# Altium PCB RASP.PcbDoc
Units mm, origin at the board's own origin, x right, y up, seen from the top; angles counter-clockwise.
Board outline 65 x 56 mm, 2 copper layers (Top Layer, Bottom Layer); 13 components, 15 nets, 101 pads, 0 vias.
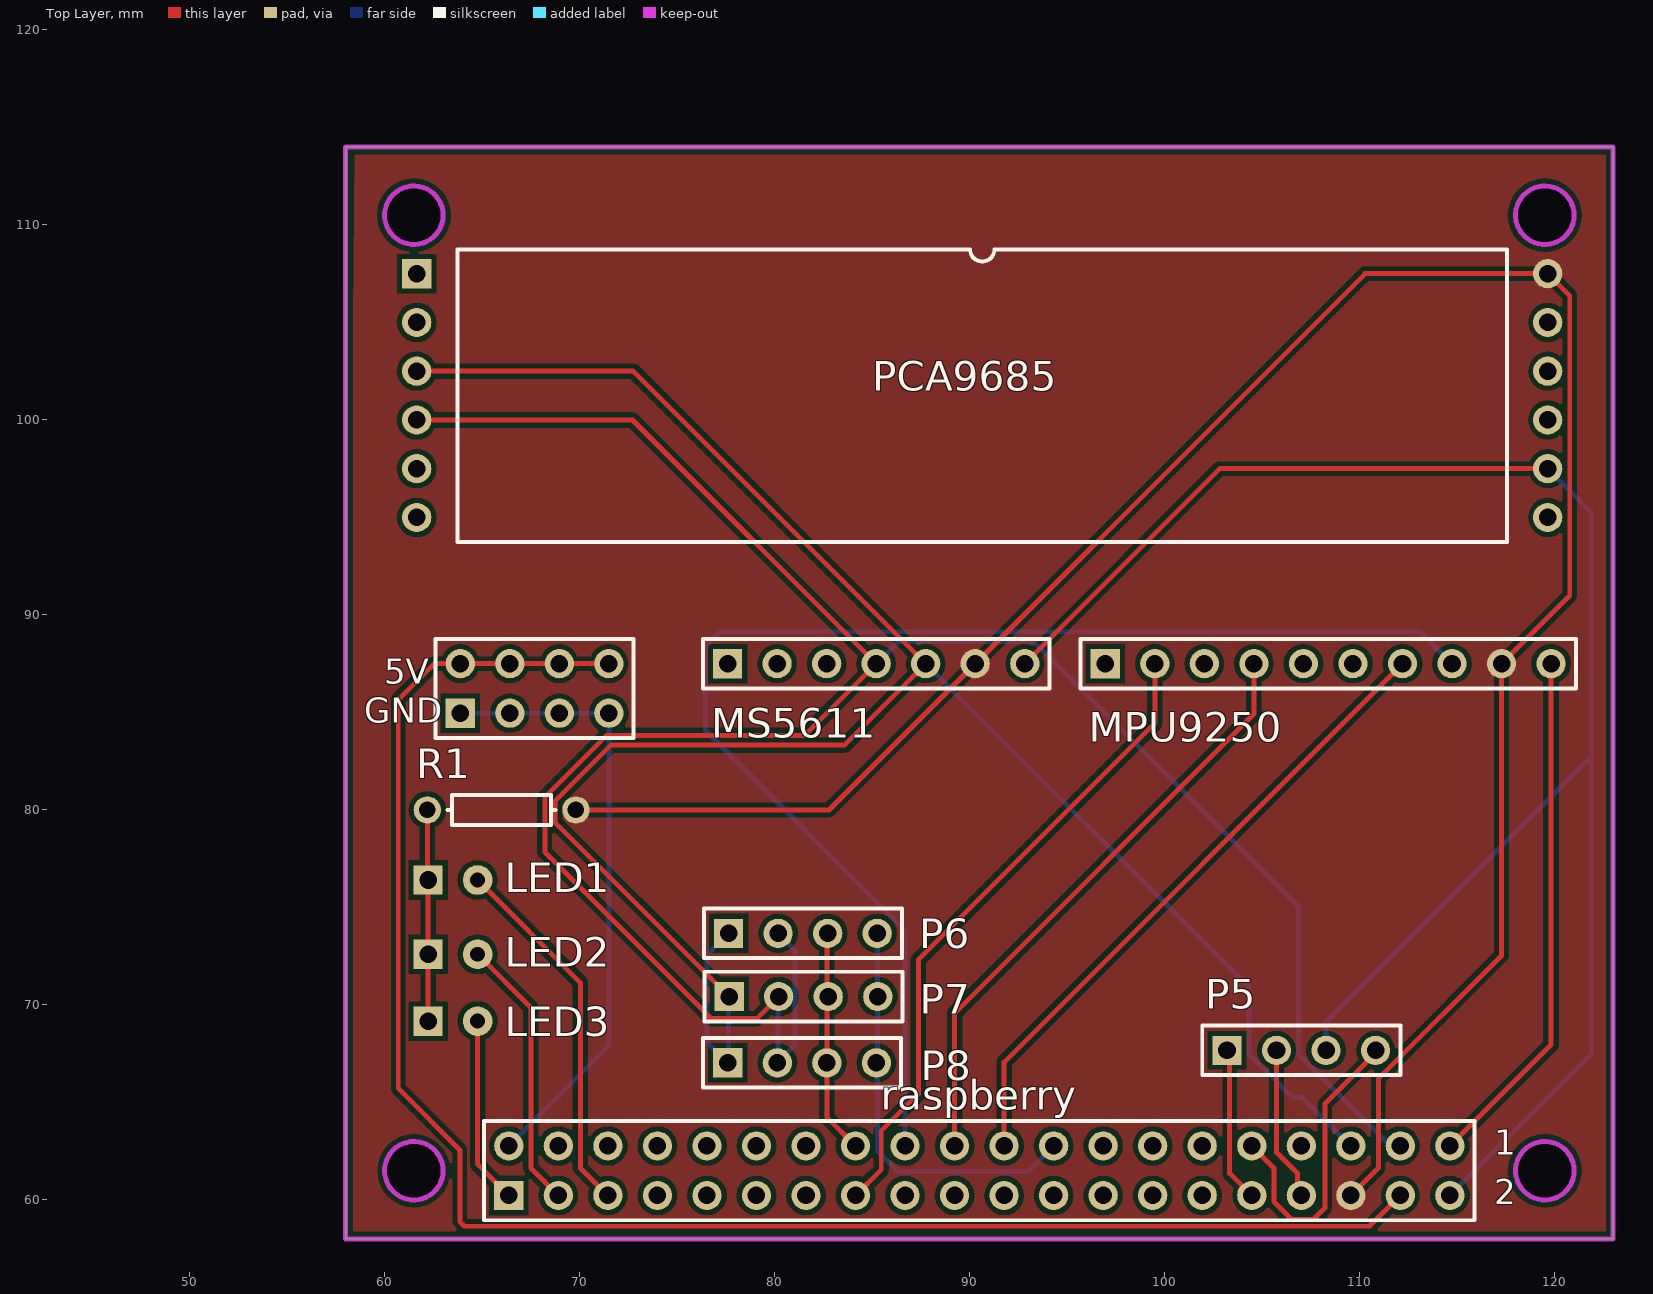
[diagram p0: Top Layer view]
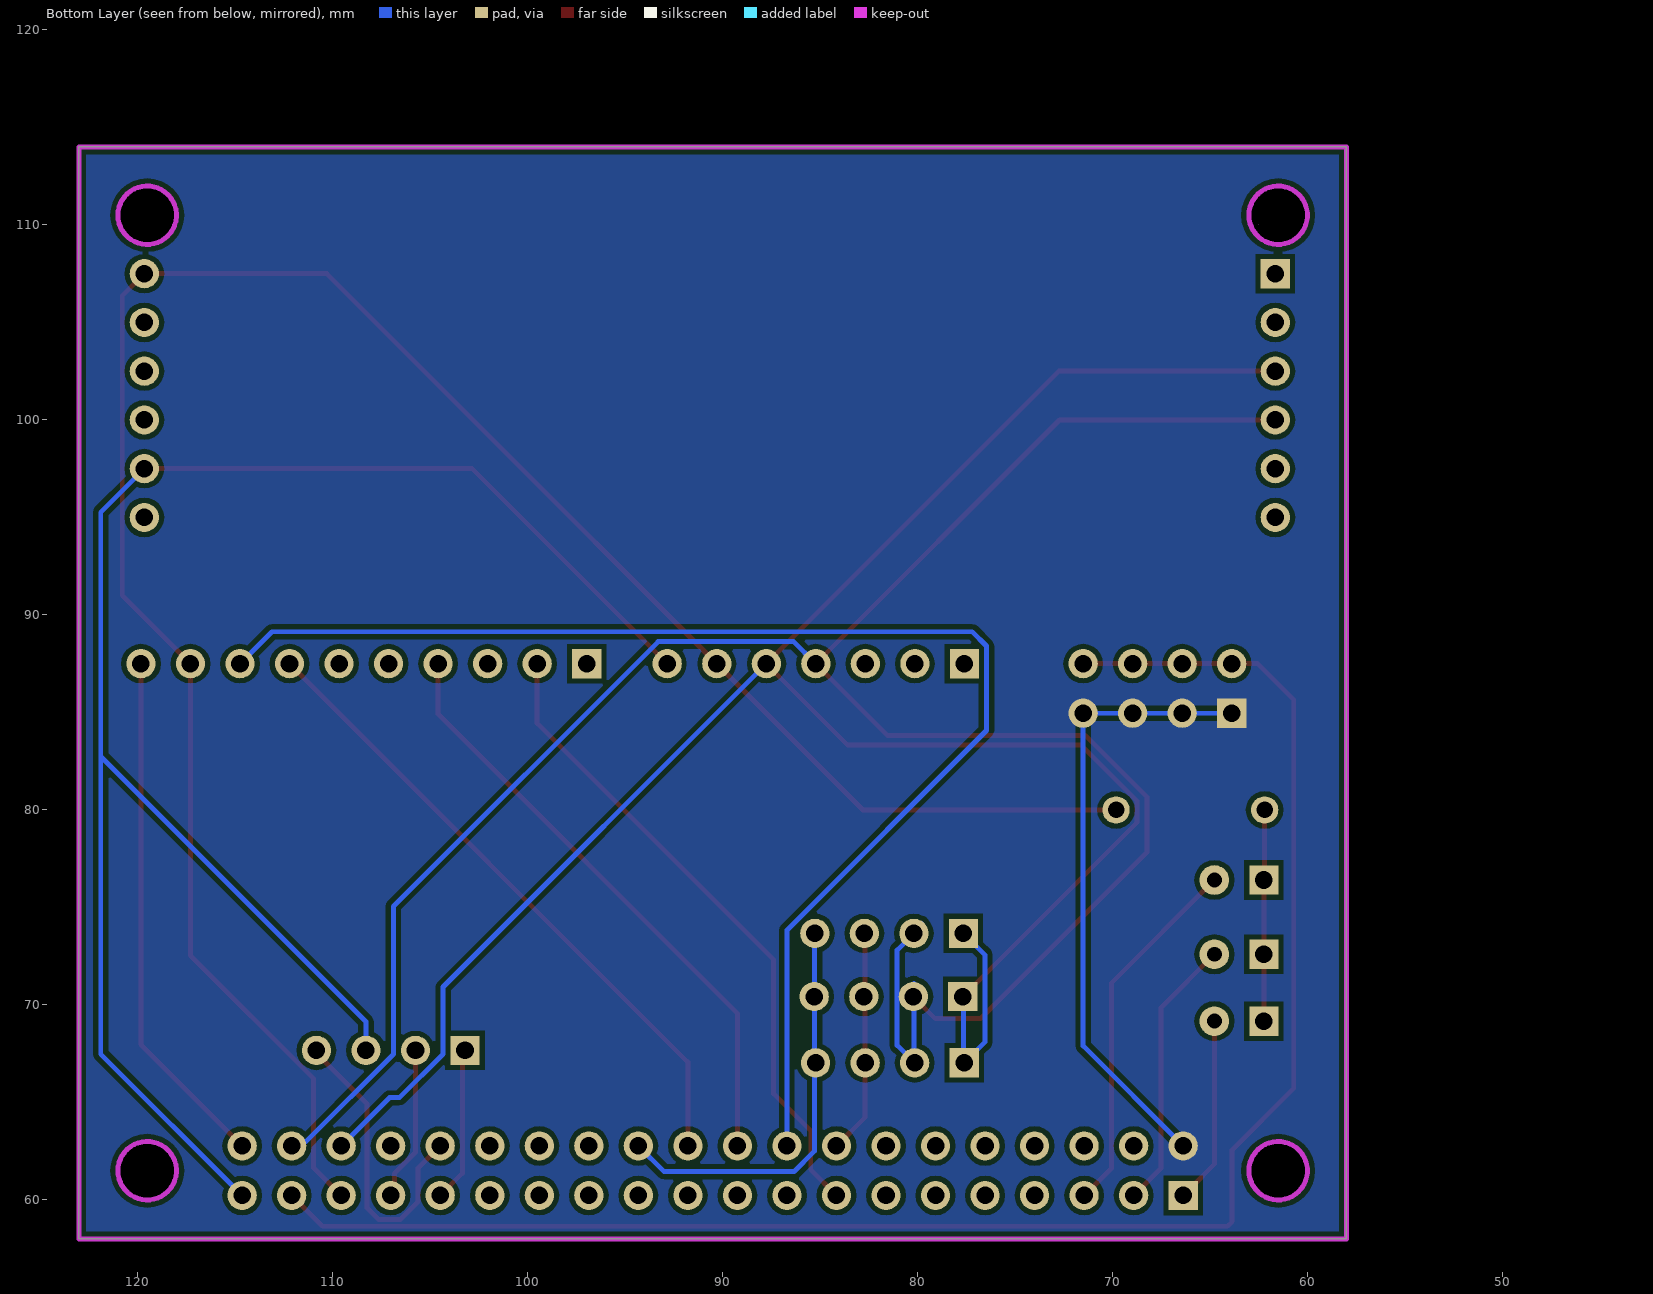
[diagram p1: Bottom Layer view, seen from below]

## Layer stack, top to bottom
Top Solder: solder mask 0.0102, Solder Resist, Dk 3.5
Top Layer: signal copper 0.0356
Dielectric 1: dielectric 0.32, FR-4, Dk 4.8
Bottom Layer: signal copper 0.0356
Bottom Solder: solder mask 0.0102, Solder Resist, Dk 3.5

## Board outline
58,58 58,114 123,114 123,58
cut-out: 61.5,60 cw(c61.5,61.5) 60,61.5 cw(c61.5,61.5) 61.5,63 cw(c61.5,61.5) 63,61.5 cw(c61.5,61.5)
cut-out: 118,61.5 ccw(c119.5,61.5) 119.5,60 ccw(c119.5,61.5) 121,61.5 ccw(c119.5,61.5) 119.5,63 ccw(c119.5,61.5)
cut-out: 118,110.5 ccw(c119.5,110.5) 119.5,109 ccw(c119.5,110.5) 121,110.5 ccw(c119.5,110.5) 119.5,112 ccw(c119.5,110.5)
cut-out: 61.5,109 cw(c61.5,110.5) 60,110.5 cw(c61.5,110.5) 61.5,112 cw(c61.5,110.5) 63,110.5 cw(c61.5,110.5)
cut-out: 62.5,110

## Design rules (kind name [scope] priority, off if disabled: settings)
Clearance [All] p1: gap=0.254 ignorepadtopadclearanceinfootprint=FALSE except(0: Arc-Hole Track-Hole SMDPad-Hole THPad-Hole Via-Hole Fill-Hole Poly-Hole Region-Hole Text-Hole)
PolygonConnect [All] p1: connectstyle=Direct reliefconductorwidth=0.254 reliefentries=4 polygonreliefangle="90 Angle" airgapwidth=0.254
RoutingVias [All] p1: holewidth=0.711 width=1.27 viastyle="Through Hole" minholewidth=0.711 minwidth=1.27 maxholewidth=0.711 maxwidth=1.27
SolderMaskExpansion [All] p1: expansion=0.102
Width [All] p1: maxlimit=0.254 minlimit=0.254 preferedwidth=0.254
30 further rules are at their usual default settings.

## Classes and differential pairs
component class PCA9685: PCA9685

## Components (designator, comment, footprint, x,y, rotation, side; value= is the part's Value field where it differs from the comment)
LED1 "LED0" "LED - duplicate" 62.23,76.407 r0 top
LED2 "LED0" "LED - duplicate" 62.23,72.597 r0 top
LED3 "LED0" "LED - duplicate" 62.23,69.168 r0 top
MPU9250 "MPU6250" HDR1X10 96.96,87.5 r0 top (schematic designator P2)
MS5611 "MS5611" HDR1X7 77.589,87.5 r0 top (schematic designator P1)
P5 "Comment" HDR1X4 103.2,67.67 r0 top
P6 "Comment" HDR1X4 77.64,73.67 r0 top
P7 "Comment" HDR1X4 77.67,70.43 r0 top
P8 "Comment" HDR1X4 77.6,67.03 r0 top
PCA9685 "PCA9685" "PCA9685 - duplicate1" 61.648,107.5 r0 top (schematic designator U1)
R1 "Res1" AXIAL-0.3 66,80 r180 top value=1K
raspberry "Header 20X2" HDR2X20 66.37,60.23 r0 top locked (schematic designator P3)
? "Comment" HDR2X4 63.88,84.96 r0 top

## Footprints (in the part's own frame and the unit in brackets; to place one, negate y for a bottom-side part, rotate by r counter-clockwise, add the part's x,y. Pads: shape width x height; smd on the part's side, far side on the other; paste and mask are expansions set on the pad)
AXIAL-0.3 [mm] "Axial Device, Thru-Hole; 2 Leads; 0.3 in Pin Spacing"
  round 1.4 hole 0.85: 1(-3.81,0) 2(3.81,0)
  silkscreen extent -2.77,-0.76 2.77,0.76
HDR1X4 [mm] "Connector; Header; 4 Position"
  rect 1.5x1.5 hole 0.9: 1(0,0)
  round 1.5 hole 0.9: 2(2.54,0) 3(5.08,0) 4(7.62,0)
  silkscreen extent -1.27,-1.27 8.89,1.27
HDR1X7 [mm] "Connector; Header; 7 Position"
  rect 1.5x1.5 hole 0.9: 1(0,0)
  round 1.5 hole 0.9: 2(2.54,0) 3(5.08,0) 4(7.62,0) 5(10.16,0) 6(12.7,0) 7(15.24,0)
  silkscreen extent -1.27,-1.27 16.51,1.27
HDR1X10 [mm] "Connector; Header; 10 Position"
  rect 1.5x1.5 hole 0.9: 1(0,0)
  round 1.5 hole 0.9: 2(2.54,0) 3(5.08,0) 4(7.62,0) 5(10.16,0) 6(12.7,0) 7(15.24,0) 8(17.78,0) 9(20.32,0) 10(22.86,0)
  silkscreen extent -1.27,-1.27 24.13,1.27
HDR2X4 [mm] "Connector; Header; 4x2 Position"
  rect 1.5x1.5 hole 0.9: 1(0,0)
  round 1.5 hole 0.9: 2(0,2.54) 3(2.54,0) 4(2.54,2.54) 5(5.08,0) 6(5.08,2.54) 7(7.62,0) 8(7.62,2.54)
  silkscreen extent -1.27,-1.27 8.89,3.81
HDR2X20 [mm] "Connector; Header; 20x2 Position"
  round 1.5 hole 0.9: 1(48.26,2.54) 2(48.26,0) 3(45.72,2.54) 4(45.72,0) 5(43.18,2.54) 6(43.18,0) 7(40.64,2.54) 8(40.64,0) 9(38.1,2.54) 10(38.1,0) 11(35.56,2.54) 12(35.56,0) 13(33.02,2.54) 14(33.02,0) 15(30.48,2.54) 16(30.48,0) 17(27.94,2.54) 18(27.94,0) 19(25.4,2.54) 20(25.4,0) 21(22.86,2.54) 22(22.86,0) 23(20.32,2.54) 24(20.32,0) 25(17.78,2.54) 26(17.78,0) 27(15.24,2.54) 28(15.24,0) 29(12.7,2.54) 30(12.7,0) 31(10.16,2.54) 32(10.16,0) 33(7.62,2.54) 34(7.62,0) 35(5.08,2.54) 36(5.08,0) 37(2.54,2.54) 38(2.54,0) 39(0,2.54)
  rect 1.5x1.5 hole 0.9: 40(0,0)
  silkscreen extent -1.27,-1.27 49.53,3.81
"LED - duplicate" [mm] "LED; 2 Leads"
  rect 1.5x1.5 hole 0.9: 1(0,0)
  round 1.524 hole 0.762: 2(2.54,0)
"PCA9685 - duplicate1" [mm]
  rect 1.5x1.5 hole 0.9: 1(0,0)
  round 1.5 hole 0.9: 2(0,-2.5) 3(0,-5) 4(0,-7.5) 5(0,-10) 6(0,-12.5) 7(58,-12.5) 8(58,-10) 9(58,-7.5) 10(58,-5) 11(58,-2.5) 12(58,0)
  silkscreen extent 2.08,-13.75 55.92,1.25

## Part data
LED1 LED2 LED3: "Typical INFRARED GaAs LED", LatestRevisionDate=08-Jul-2005, LatestRevisionNote="Mech Layer 1 removed.", PackageDescription="LED; 2 Leads", PackageReference=LED-0, Published=8-Jun-2000, Publisher="Altium Limited"
MPU9250: library part "Header 10", "Header, 10-Pin", LatestRevisionDate=17-Jul-2002, LatestRevisionNote="Re-released for DXP Platform.", Publisher="Altium Limited"
MS5611: library part "Header 7", "Header, 7-Pin", LatestRevisionDate=17-Jul-2002, LatestRevisionNote="Re-released for DXP Platform.", Publisher="Altium Limited"
R1: "Resistor", LatestRevisionDate=17-Jul-2002, LatestRevisionNote="Re-released for DXP Platform.", PackageDescription="Axial Device, Thru-Hole; 2 Leads; 0.3 in Pin Spacing", PackageReference=AXIAL-0.3, Published=8-Jun-2000, Publisher="Altium Limited"
raspberry: "Header, 20-Pin, Dual row", LatestRevisionDate=17-Jul-2002, LatestRevisionNote="Re-released for DXP Platform.", Publisher="Altium Limited"

## Nets (pads, with @x,y where several pads share a name; then routed paths per layer and width w, separated by ;. In a path a pad name is that pad's centre, name@x,y a point inside that pad or via, vN(x,y) a via of type N, cw(c..) or ccw(c..) an arc to the next point about the centre after c; other vN are vias at no path point)
3.3V: MPU9250.10 raspberry.1 | length 26.9
  Top Layer w0.254: raspberry.1 119.82,67.96 MPU9250.10
5V: PCA9685.7
GND1: MPU9250.9 MS5611.6 PCA9685.12 R1.1 raspberry.6 | length 113.6
  Top Layer w0.254: R1.1 82.789,80 110.289,107.5 PCA9685.12 120.779,106.369 120.779,90.999 MPU9250.9 117.28,72.531 110.959,66.21 110.959,61.639 raspberry.6
GND2: ?.1 ?.3 ?.5 ?.7 raspberry.39 | length 31.9
  Bottom Layer w0.254: ?.1 ?.7 71.5,67.9 raspberry.39
LED1: LED1.2 raspberry.36 | length 18.9
  Top Layer w0.254: LED1.2 70.041,71.136 70.041,61.639 raspberry.36
LED2: LED2.2 raspberry.38 | length 14.1
  Top Layer w0.254: LED2.2 67.501,69.866 67.501,61.639 raspberry.38
LED3: LED3.2 raspberry.40 | length 9.4
  Top Layer w0.254: LED3.2 64.77,61.83 65.97,60.63 raspberry.40@65.97,60.23
R: LED1.1 LED2.1 LED3.1 R1.2 | length 10.8
  Top Layer w0.254: LED1.1@62.19,76.447 R1.2 ; LED3.1 LED1.1
RXD: P5.1 raspberry.10 | length 8.3
  Top Layer w0.254: P5.1@103.339,68.02 103.339,61.361 raspberry.10
SCL: MS5611.5 P6.1 P7.1 P8.1 PCA9685.3 raspberry.5 | length 113.6
  Top Layer w0.254: PCA9685.3@61.678,102.5 72.749,102.5 MS5611.5 83.57,83.321 71.602,83.321 68.729,80.448 68.729,79.371 77.579,70.521 P7.1@77.761,70.521
  Bottom Layer w0.254: P8.1 76.539,68.091 76.539,72.569 78.085,74.115 P6.1@78.135,74.115 ; P8.1@77.64,67.07 P7.1@77.64,70.43 ; MS5611.5 104.331,70.918 104.331,67.48 106.567,65.244 107.076,65.244 raspberry.5
SCL1: MPU9250.8 raspberry.23 | length 69.1
  Bottom Layer w0.254: raspberry.23 86.69,73.839 76.458,84.071 76.458,88.408 77.189,89.139 113.101,89.139 MPU9250.8
SDA: MS5611.4 P6.2 P7.2 P8.2 PCA9685.4 raspberry.3 | length 121.9
  Top Layer w0.254: PCA9685.4 72.709,100 MS5611.4 81.538,83.829 71.392,83.829 68.221,80.658 68.221,77.84 76.762,69.299 79.079,69.299 P7.2
  Bottom Layer w0.254: P6.2@79.8,74.19 80.25,73.74 80.25,73.6 81.041,72.809 81.041,67.931 P8.2@80.18,67.07 ; P8.2 P8.2@80.18,67.07 ; P7.2@80.18,71.11 80.18,70.43 80.175,70.425 80.175,67.075 P8.2@80.18,67.07 ; MS5611.4@85.273,87.565 86.34,88.631 93.297,88.631 106.871,75.057 106.871,67.48 111.342,63.008 111.852,63.008 raspberry.3
SDA1: MPU9250.7 raspberry.19 | length 33.2
  Top Layer w0.254: raspberry.19 91.77,67.07 MPU9250.7
TXD: P5.2 raspberry.8 | length 8
  Top Layer w0.254: P5.2@105.879,67.67 105.74,67.531 105.74,62.441 106.82,61.361 106.82,60.42 raspberry.8
VCC: MS5611.7 P5.3 PCA9685.8 raspberry.2 | length 92.9
  Top Layer w0.254: MS5611.7 102.829,97.5 PCA9685.8
  Bottom Layer w0.254: P5.3 108.28,69.14 121.88,82.74 ; raspberry.2 121.88,67.48 121.88,82.74 ; PCA9685.8 121.88,95.268 121.88,82.74
pads on no net: ?.2 ?.4 ?.6 ?.8 MPU9250.1 MPU9250.2 MPU9250.3 MPU9250.4 MPU9250.5 MPU9250.6 MS5611.1 MS5611.2 MS5611.3 P5.4 P6.3 P6.4 P7.3 P7.4 P8.3 P8.4 PCA9685.1 PCA9685.2 PCA9685.5 PCA9685.6 PCA9685.9 PCA9685.10 PCA9685.11 raspberry.4 raspberry.7 raspberry.9 raspberry.11 raspberry.12 raspberry.13 raspberry.14 raspberry.15 raspberry.16 raspberry.17 raspberry.18 raspberry.20 raspberry.21 raspberry.22 raspberry.24 raspberry.25 raspberry.26 raspberry.27 raspberry.28 raspberry.29 raspberry.30 raspberry.31 raspberry.32 raspberry.33 raspberry.34 raspberry.35 raspberry.37
copper on no net: | length 201.7
  Top Layer w0.254: 71.5,87.5 68.96,87.5 66.42,87.5 63.88,87.5 62.55,87.5 60.7,85.65 60.7,65.72 63.86,62.56 63.86,58.89 64.1,58.65 110.51,58.65 112.09,60.23 ; 82.68,73.67 82.68,64.24 ; 82.692,64.228 82.68,64.24 ; 84.15,60.23 85.47,61.55 85.47,63.54 87.37,65.44 87.37,72.31 99.5,84.44 99.5,87.5 ; 84.15,62.77 82.68,64.24 ; 89.23,62.77 89.23,69.57 104.58,84.92 104.58,87.5 ; 104.47,62.77 105.61,61.63 105.61,59.91 106.52,59 107.63,59 108.22,59.59 108.22,64.92 110.895,67.595
  Bottom Layer w0.254: 85.28,73.67 85.28,62.51 85.34,62.45 85.34,62.44 86.33,61.45 92.99,61.45 94.31,62.77

## Polygon pours and split planes (outlines as drawn)
GND1 on Top Layer (solid, pour order 10): 58.46,114 123,114 123,58 58,58
no net on Top Layer "Top Layer-No Net" (solid, pour order 0): 88.011,116.586
GND2 on Bottom Layer (solid, pour order 12): 58,114 123,114 123,58 58,58

## Keep-outs
Top Layer:
  region: 65.5,115.5
  region: 44.323,118.618
Keep-Out Layer:
  circle w0.254: c119.5,61.5 r1.5
  circle w0.254: c119.5,110.5 r1.5
  circle w0.254: c61.5,61.5 r1.5
  circle w0.254: c61.5,110.5 r1.5
  lines w0.254: 58,58 58,114 123,114 123,58 58,58

## Text inside footprints (layer, text, board x,y; h text height)
raspberry: Top Overlay "1" at 116.916,62.309 h1.27; Top Overlay "2" at 116.916,59.769 h1.27
?: Top Overlay "GND" at 58.96,84.46 h1.27; Top Overlay "5V" at 59.989,86.46 h1.27